# Altium PCB W-F-FC-HX3X.PcbDoc
Units mm, origin at the board's own origin, x right, y up, seen from the top; angles counter-clockwise.
Board outline 48.25 x 57.25 mm, 2 copper layers (Top Layer, Bottom Layer); 14 components, 15 nets, 42 pads, 0 vias.
Unrouted connection lines stored in the file: 8.
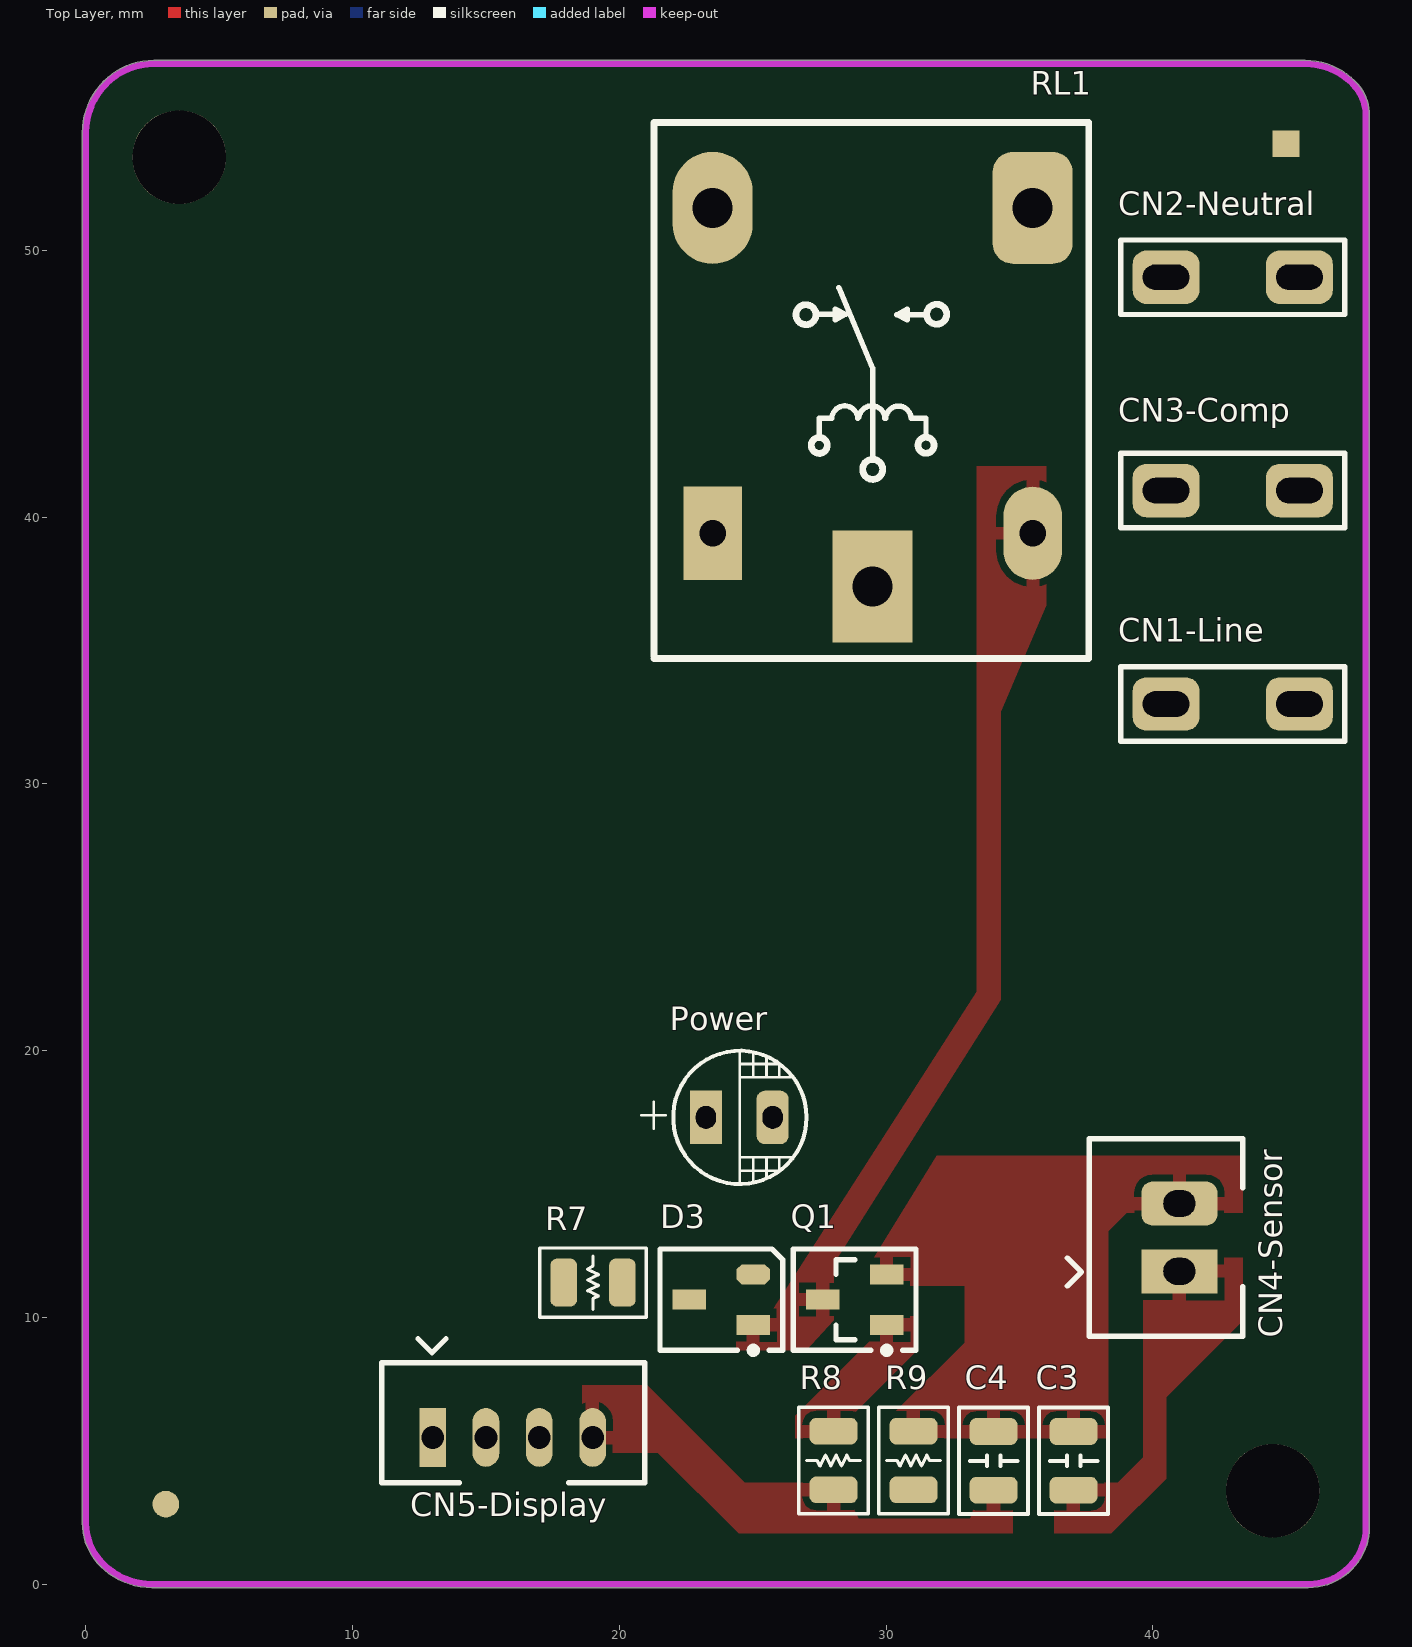
[diagram p0: Top Layer view]
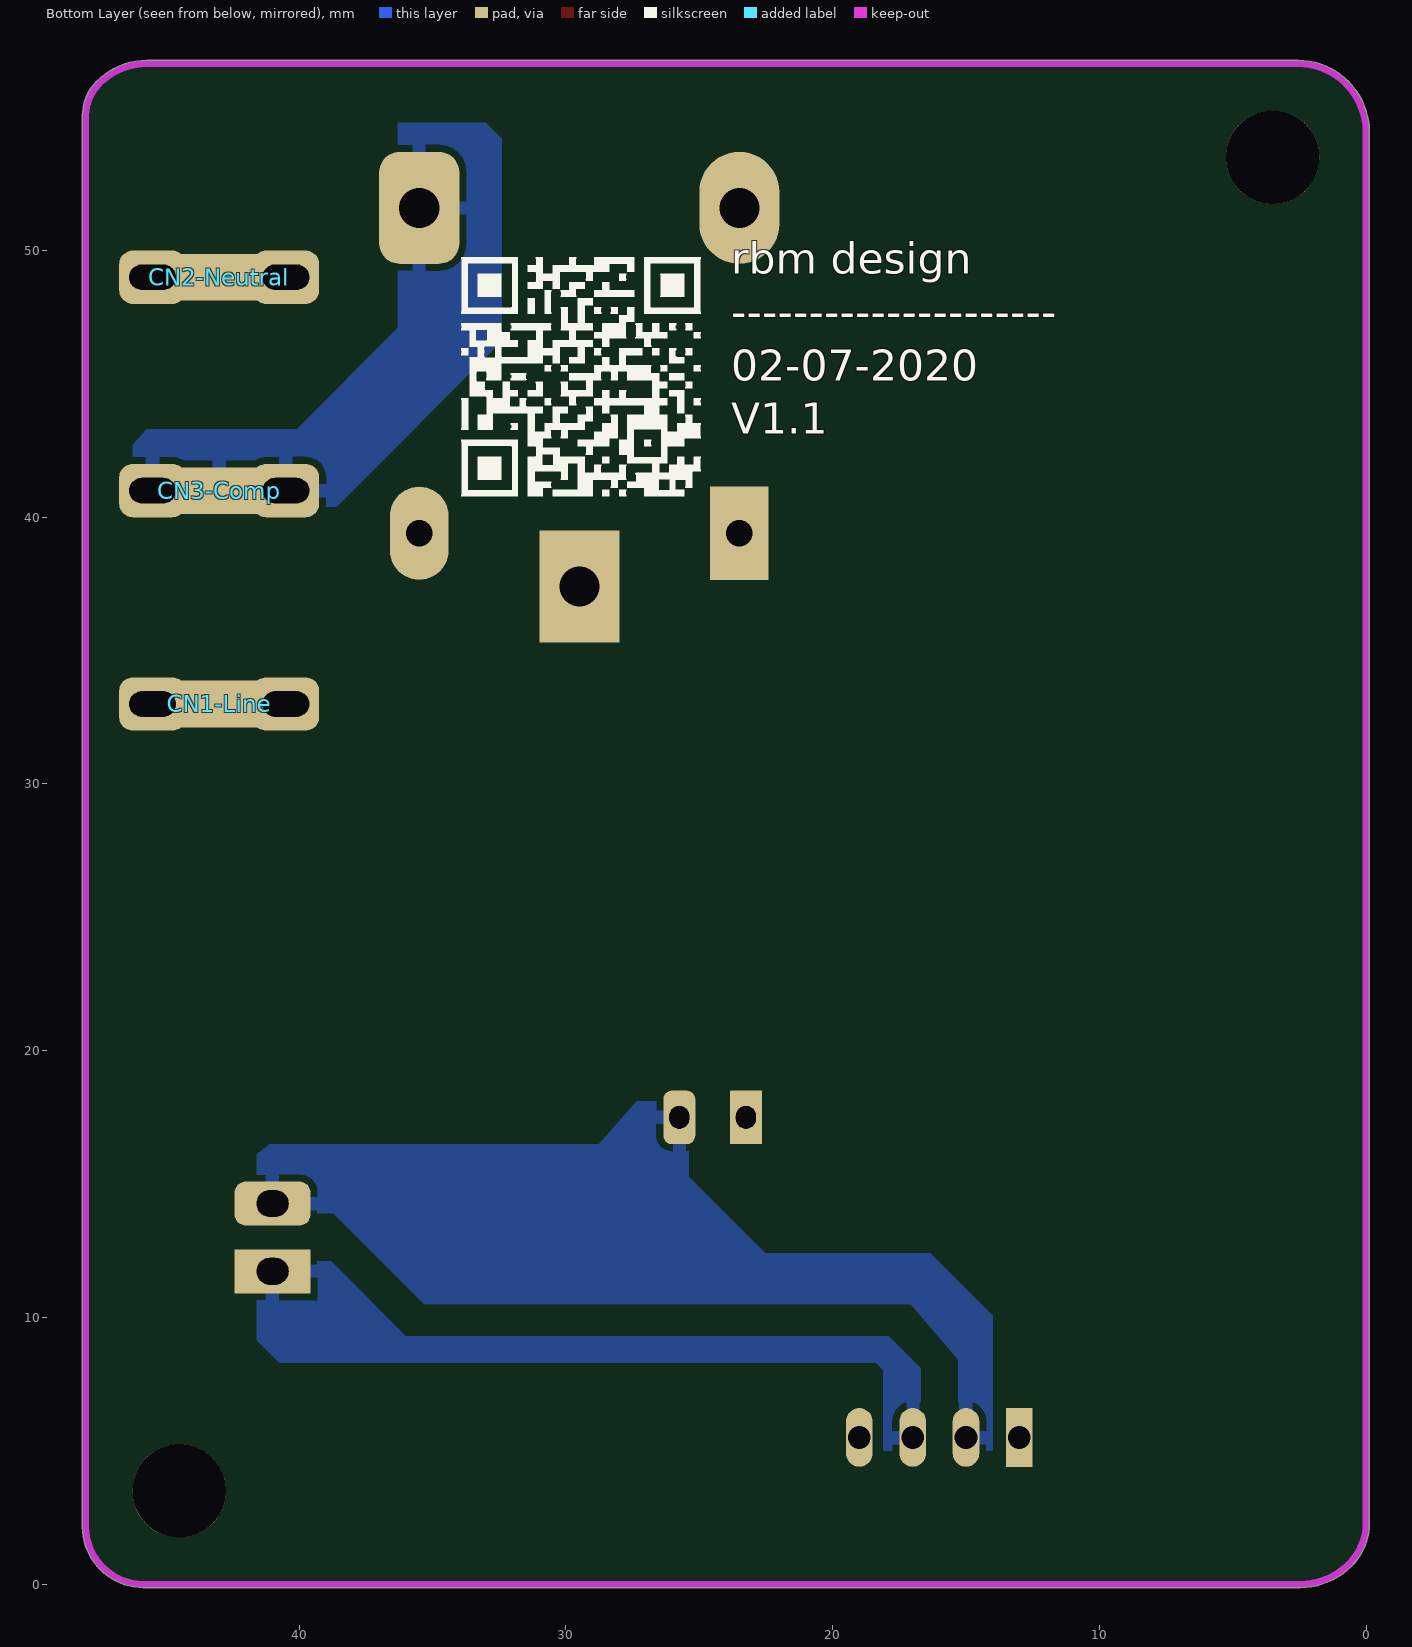
[diagram p1: Bottom Layer view, seen from below]

## Layer stack, top to bottom
Top Solder: solder mask 0.0102, Solder Resist, Dk 3.5
Top Layer: signal copper 0.0356
Dielectric 1: dielectric 0.32, FR-4, Dk 4.8
Bottom Layer: signal copper 0.0356
Bottom Solder: solder mask 0.0102, Solder Resist, Dk 3.5

## Board outline
0.545,0.672 cw(c2.168,2.295) -0.127,2.295 -0.127,54.421 cw(c2.602,54.421) 0.672,56.351 cw(c2.546,54.477) 2.546,57.127 45.714,57.127 cw(c45.714,54.477) 47.588,56.351 cw(c46.286,55.049) 48.127,55.049 48.127,2.154 cw(c45.852,2.154) 47.461,0.545 cw(c45.838,2.168) 45.838,-0.127 2.475,-0.127 cw(c2.475,2.602)

## Design rules (kind name [scope] priority, off if disabled: settings)
Clearance [All] p1: gap=0.254 ignorepadtopadclearanceinfootprint=FALSE except(0: Arc-Hole Track-Hole SMDPad-Hole THPad-Hole Via-Hole Fill-Hole Poly-Hole Region-Hole Text-Hole)
HoleSize [All] p1: absolutevalues=TRUE maxlimit=5 minlimit=0.025 maxpercent=80.000 minpercent=20.000
PlaneConnect [All] p1: planeconnectstyle=Relief reliefexpansion=0.508 reliefentries=4 reliefconductorwidth=3 reliefairgap=0.254
PolygonConnect PolygonConnect_Power [(InNet('NetC2_1'))] p1: connectstyle=Direct reliefconductorwidth=0.254 reliefentries=4 polygonreliefangle="90 Angle" airgapwidth=0.254
PolygonConnect [All] p2: connectstyle=Relief reliefconductorwidth=0.5 reliefentries=4 polygonreliefangle="90 Angle" airgapwidth=0.254
RoutingLayers [All] p1: top layer_v5=FALSE bottom layer_v5=TRUE
RoutingVias [All] p1: holewidth=0.711 width=1.27 viastyle="Through Hole" minholewidth=0.711 minwidth=1.27 maxholewidth=3 maxwidth=4
SolderMaskExpansion [All] p1: expansion=0.102 istentingtop=FALSE
Width Width_Power_Line [(InNet('GND') AND InNet('VCC'))] p1: maxlimit=5 minlimit=0.4 preferedwidth=0.5
Width [All] p2: maxlimit=5 minlimit=0.254 preferedwidth=0.5
27 further rules are at their usual default settings.

## Components (designator, comment, footprint, x,y, rotation, side; value= is the part's Value field where it differs from the comment)
C3 "0.1uF 16V 10%" C_0805 37.032,4.623 r90 top
C4 "0.1uF 16V 10%" C_0805 34.032,4.623 r90 top
CN1-Line "1P" "CN_TAB TERMINAL 250 SERIES (RIGHT ANGLE)" 43,33 r0 top
CN2-Neutral "1P" "CN_TAB TERMINAL 250 SERIES (RIGHT ANGLE)" 43,49 r0 top
CN3-Comp "1P" "CN_TAB TERMINAL 250 SERIES (RIGHT ANGLE)" 43,41 r0 top
CN4-Sensor "2P 2.5mm 180°" CN_B2B-XH-A_RED 41,13 r180 top locked
CN5-Display "4P 2mm 180°" CN_4P_A2001WV-XP-180DEG 16,5.5 r90 top locked
D3 "V 200mA" D_SOT-23-3_200MA 23.825,10.668 r90 top
Power "3.2Vf 20mA" LED_3X5_P2.5 24.5,17.5 r0 top (schematic designator LD1)
Q1 "NPN 200mA" Q_SOT-23-3_NPN_BC847 28.825,10.668 r90 top
R7 "4.7kΩ 1/8W 5%" R_0805 19.016,11.305 r0 top
R8 "1KΩ 1/8W 5%" R_0805 28.032,4.635 r90 top
R9 "47KΩ 1/8W 5%" R_0805 31.032,4.635 r90 top
RL1 "12VDC 15A" RL_SPST_15ARELAY_AZ943-1AH-12DE 29.5,44.5 r90 top locked

## Footprints (in the part's own frame and the unit in brackets; to place one, negate y for a bottom-side part, rotate by r counter-clockwise, add the part's x,y. Pads: shape width x height; smd on the part's side, far side on the other; paste and mask are expansions set on the pad)
C_0805 [mm]
  rrect50% 1x1.8 smd: 1(-1.1,0) 2(1.1,0)
  silkscreen extent -2,-1.3 2,1.3, body extent -1.1,-0.72 1.1,0.73, height 1
CN_4P_A2001WV-XP-180DEG [mm] "Top Entry Header 1.25mm pitch 1X4pin  180° long"
  rect 2.2x1 hole 0.85: 1(0,3)
  oval 2.2x1 hole 0.85: 2(0,1) 3(0,-1) 4(0,-3)
  silkscreen extent -1.7,-4.95 3.7,4.9, body extent -1.7,-4.95 2.8,4.95, height 6
CN_B2B-XH-A_RED [mm]
  rect 2.85x1.65 hole 1.2 slot 1 at 90 deg: 1(0,1.27)
  rrect50% 2.85x1.65 hole 1.2 slot 1 at 90 deg: 2(0,-1.27)
  silkscreen extent -2.37,-3.7 4.2,3.7, body extent -2.37,-3.7 3.38,3.7, height 7
"CN_TAB TERMINAL 250 SERIES (RIGHT ANGLE)" [mm]
  rrect50% 2.5x2 hole 0.95 slot 1.75 at 0 deg: 1(-2.5,0) 1(2.5,0)
  rect 2.85x1.75 smd far side: 1(0,0)
  silkscreen extent -4.2,-1.4 4.2,1.4, body extent -4,-0.4 12.2,0.4, height 9.1
D_SOT-23-3_200MA [mm] "Diodes - General Purpose 100V 200mA 1.25V @ 200mA SOT-23(SOT-23-3) RoHS"
  oct 0.75x1.25 smd: 0(0.95,-1.2)
  rect 0.75x1.25 smd: 1(-0.95,-1.2) 2(0,1.2)
  silkscreen extent -2.02,-2.3 1.9,2.3, body extent -1.5,-1.3 1.5,1.3, height 1.15
LED_3X5_P2.5 [mm]
  rect 1.2x2 hole 0.85 slot 0.75 at 0 deg: 1(-1.25,0)
  rrect50% 1.2x2 hole 0.85 slot 0.75 at 0 deg: 2(1.25,0)
  silkscreen extent -3.67,-2.5 2.52,2.5, body extent -1.97,-1.5 2.01,1.99, height 7.38
Q_SOT-23-3_NPN_BC847 [mm] "SOT23, 3-Leads, Body 2.90x2.45mm, Pitch 0.95mm, IPC Medium Density"
  rect 0.75x1.25 smd: 1(-0.95,-1.2) 2(0.95,-1.2) 3(0,1.2)
  silkscreen extent -2.02,-2.3 1.9,2.3, body extent -1.5,-1.3 1.5,1.3, height 1.15
R_0805 [mm]
  rrect50% 1x1.8 smd: 1(-1.1,0) 2(1.1,0)
  silkscreen extent -2,-1.3 2,1.3, body extent -1.1,-0.72 1.1,0.73, height 0.65
RL_SPST_15ARELAY_AZ943-1AH-12DE [mm]
  oval 3.5x2.2 hole 1: 1(-5.1,-6)
  rect 3.5x2.2 hole 1: 2(-5.1,6)
  rect 4.2x3 hole 1.5: 3(-7.1,0)
  rrect50% 4.2x3 hole 1.5: 4(7.1,-6)
  oval 4.2x3 hole 1.5: 5(7.1,6)
  silkscreen extent -9.8,-8.1 10.3,8.2, body extent -9.8,-8.1 10.3,8.2, height 15

## Part data
C3 C4: library part "Capacitor>> Non-Polar", "Multilayer Ceramic Capacitors, SMD 0805"
CN1-Line CN2-Neutral CN3-Comp: library part "Connector>> 1Pin", "6.3mm PCB Tab Terminal (Right Angle)"
CN4-Sensor: library part "Connector>> 2Pins", "A2512WV-XP, 2Pins, 2.5mmPitch, 180° Wafer, RED, Through Hole"
CN5-Display: library part "Connector>> 4Pins", "A2001WV-XP, 4Pins, 2mmPitch, 180° Wafer, White, , Through Hole"
D3: library part "Diode>> General Purpose", "BAS19, SOT-23-3"
Power: library part "LED>> General Purpose", "RED, Through hole, ØDxH=3x5mm Pitch=2.5mm"
Q1: library part BJT_npn, "BC847, SOT-23-3"
R7: library part "Resistor>> General Purpose", "Chip-Resistor, SMD 0805, , RoHS"
R8 R9: library part Resistor, "Chip-Resistor, SMD 0805, , RoHS"
RL1: library part "Relay>> SPST", "Zettler AZ943–1CH–12DE"

## Free pads (board coordinates)
  round 1 smd mask+0.5: 0(3,3)
  round 3.5 hole 3.5 unplated: 0(3.5,53.5) 0(44.5,3.5)
  rect 1x1 smd mask+0.5: 0(45,54)

## Nets (pads, with @x,y where several pads share a name; then routed paths per layer and width w, separated by ;. In a path a pad name is that pad's centre, name@x,y a point inside that pad or via, vN(x,y) a via of type N, cw(c..) or ccw(c..) an arc to the next point about the centre after c; other vN are vias at no path point)
+12: CN5-Display.1 D3.2 R7.1 RL1.2
AC_L: CN1-Line.1 RL1.3
AC_M: CN3-Comp.1 RL1.4
AC_N: CN2-Neutral.1
FS: C3.1 CN4-Sensor.1 CN5-Display.3
GND: C3.2 C4.2 CN4-Sensor.2 CN5-Display.2 Power.2 Q1.2 R9.2
NetC1_1: 
NetC1_2: 
NetC2_1: 
NetD1_1: 
NetD2_1: 
NetD3_1: D3.1 Q1.3 RL1.1
NetLD1_1: Power.1 R7.2
NetQ1_1: Q1.1 R8.2 R9.1
O_CoM: C4.1 CN5-Display.4 R8.1
pads on no net: D3.0 RL1.5

## Polygon pours and split planes (outlines as drawn)
GND on Bottom Layer "NONET_L-01_P-001" (solid, pour order 32): 14,5 14,10.063 16.337,12.4 22.525,12.4 25.4,15.275 25.4,18.1 27.346,18.1 28.768,16.5 41.114,16.5 41.6,16.122 41.6,13.9 38.72,13.9 35.32,10.5 17.069,10.5 15.3,8.406 15.3,5
AC_M on Bottom Layer "NONET_L-01_P-001" (solid, pour order 34): 33,54.8 32.4,54.2 32.4,46.6 38.6,40.4 46.25,40.4 46.25,42.72 45.714,43.3 40.1,43.3 36.3,47.1 36.3,54.8
FS on Bottom Layer "NONET_L-01_P-001" (solid, pour order 31): 16.7,8.1 17.9,9.3 36,9.3 38.8,12.1 41.6,12.1 41.6,9.143 40.757,8.3 18.38,8.3 18.1,8.02 18.1,5 16.7,5
FS on Top Layer "NONET_L-01_P-001" (solid, pour order 30): 39.651,12.23 39.651,4.759 38.693,3.8 36.307,3.8 36.307,1.9 38.441,1.9 40.5,3.959 40.5,7 43.375,9.875 43.375,12.23
GND on Top Layer "NONET_L-01_P-001" (solid, pour order 29): 29.525,12.201 31.91,16.058 43.375,16.058 43.375,13.925 39.025,13.925 38.332,13.232 38.332,5.461 30.329,5.461 30.329,6.438 32.944,9.053 32.944,11.18 29.525,11.18
O_CoM on Top Layer "NONET_L-01_P-001" (solid, pour order 28): 21.05,7.461 24.711,3.8 28.314,3.8 28.974,2.454 33.161,2.454 33.529,3.523 34.757,3.523 34.757,1.9 24.475,1.9 21.44,4.935 18.614,4.935 18.614,7.461
NetQ1_1 on Top Layer "NONET_L-01_P-001" (solid, pour order 27): 29.451,10.039 29.451,9.166 26.6,6.315 26.6,5.461 28.702,5.461 28.702,6.288 31.097,8.702 31.097,10.039
NetD3_1 on Top Layer "NONET_L-01_P-001" (solid, pour order 26): 36,41.91 33.401,41.91 33.401,22.21 25.502,9.906 24.384,9.906 24.384,8.763 27.019,8.763 28.032,9.898 28.032,12.009 34.3,21.912 34.3,32.708 36,36.709

## Keep-outs
Keep-Out Layer:
  lines w0.254: 44.577,0 45.838,0 ccw(c45.838,2.168) 47.371,0.635 ccw(c45.852,2.154) 48,2.154 48,3 48,54 48,55.049 ccw(c46.286,55.049) 47.498,56.261 ccw(c45.714,54.477) 45.714,57 45,57 3,57 2.546,57 ccw(c2.546,54.477) 0.762,56.261 ccw(c2.602,54.421) 0,54.421 0,54 0,3 0,2.295 ccw(c2.168,2.295) 0.635,0.762 ccw(c2.475,2.602) 2.475,0 3,0 45,0

## Silkscreen, mask and mechanical layers (free items; w line width, h text height)
Bottom Overlay:
  drawing of 44 lines, arcs and shapes, not listed
  text "rbm design / --------------------- / 02-07-2020 / V1.1" at 23.8,42.732 h2